# EAGLE board indication (EAGLE 9.6.1)
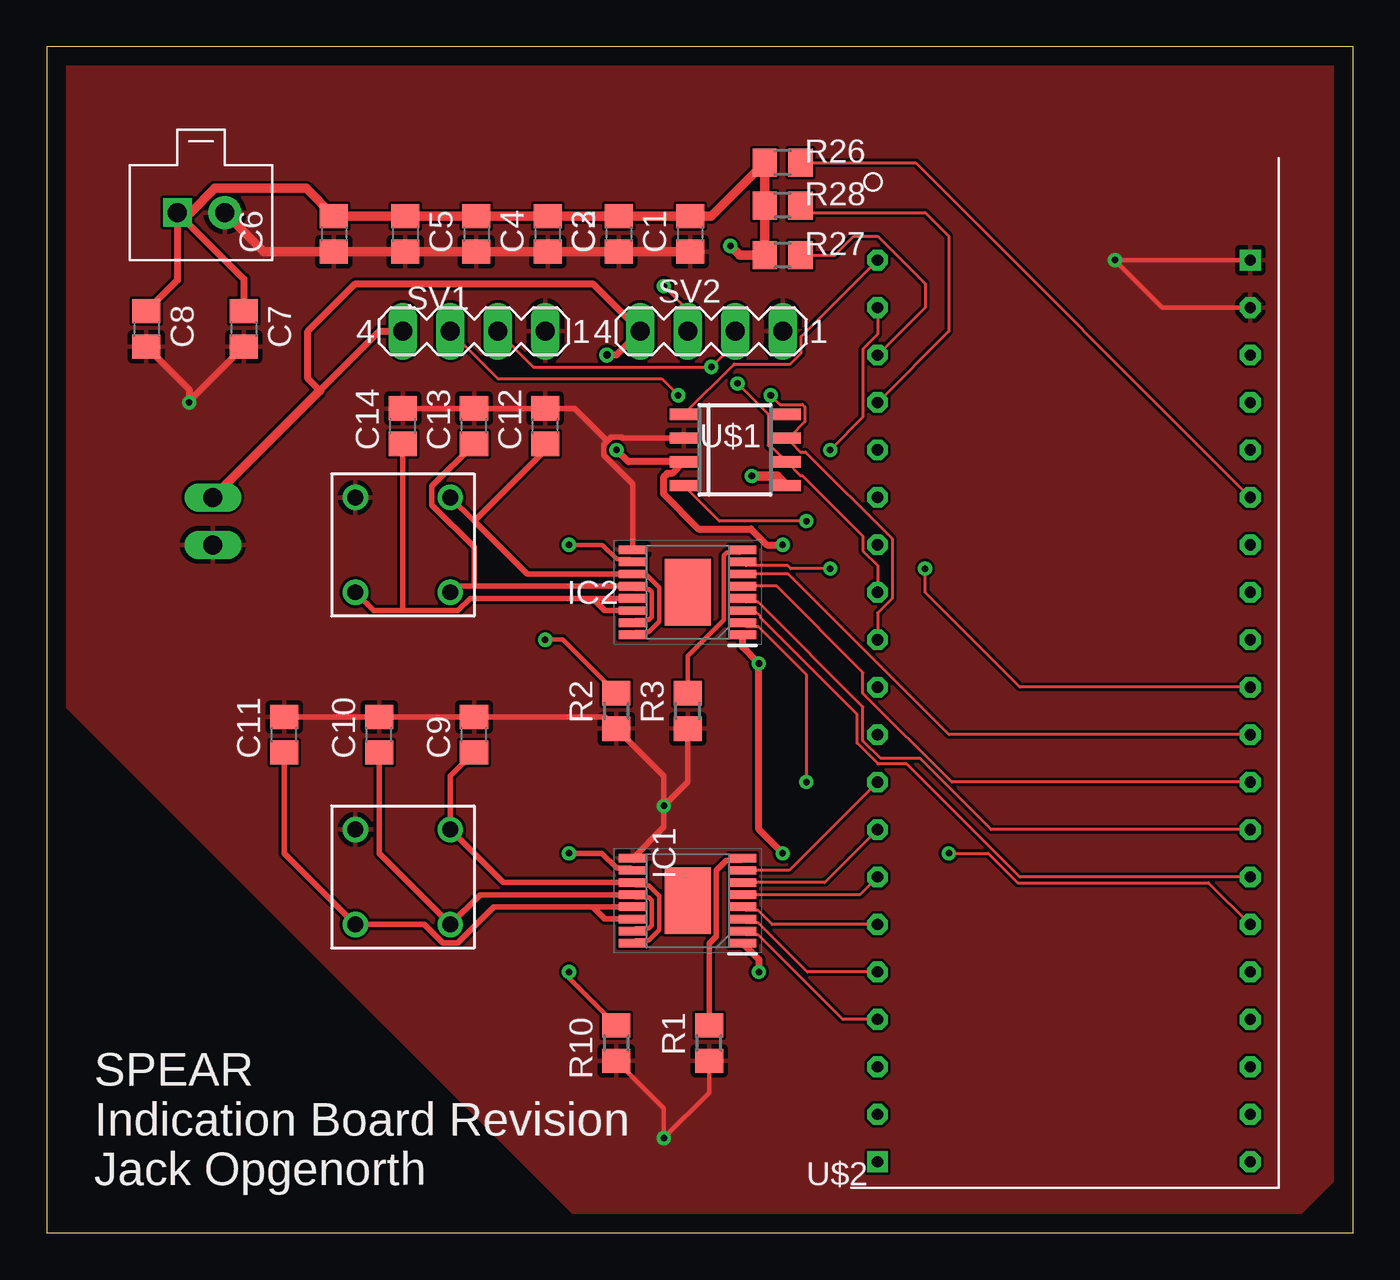
[diagram p0: board, top side]
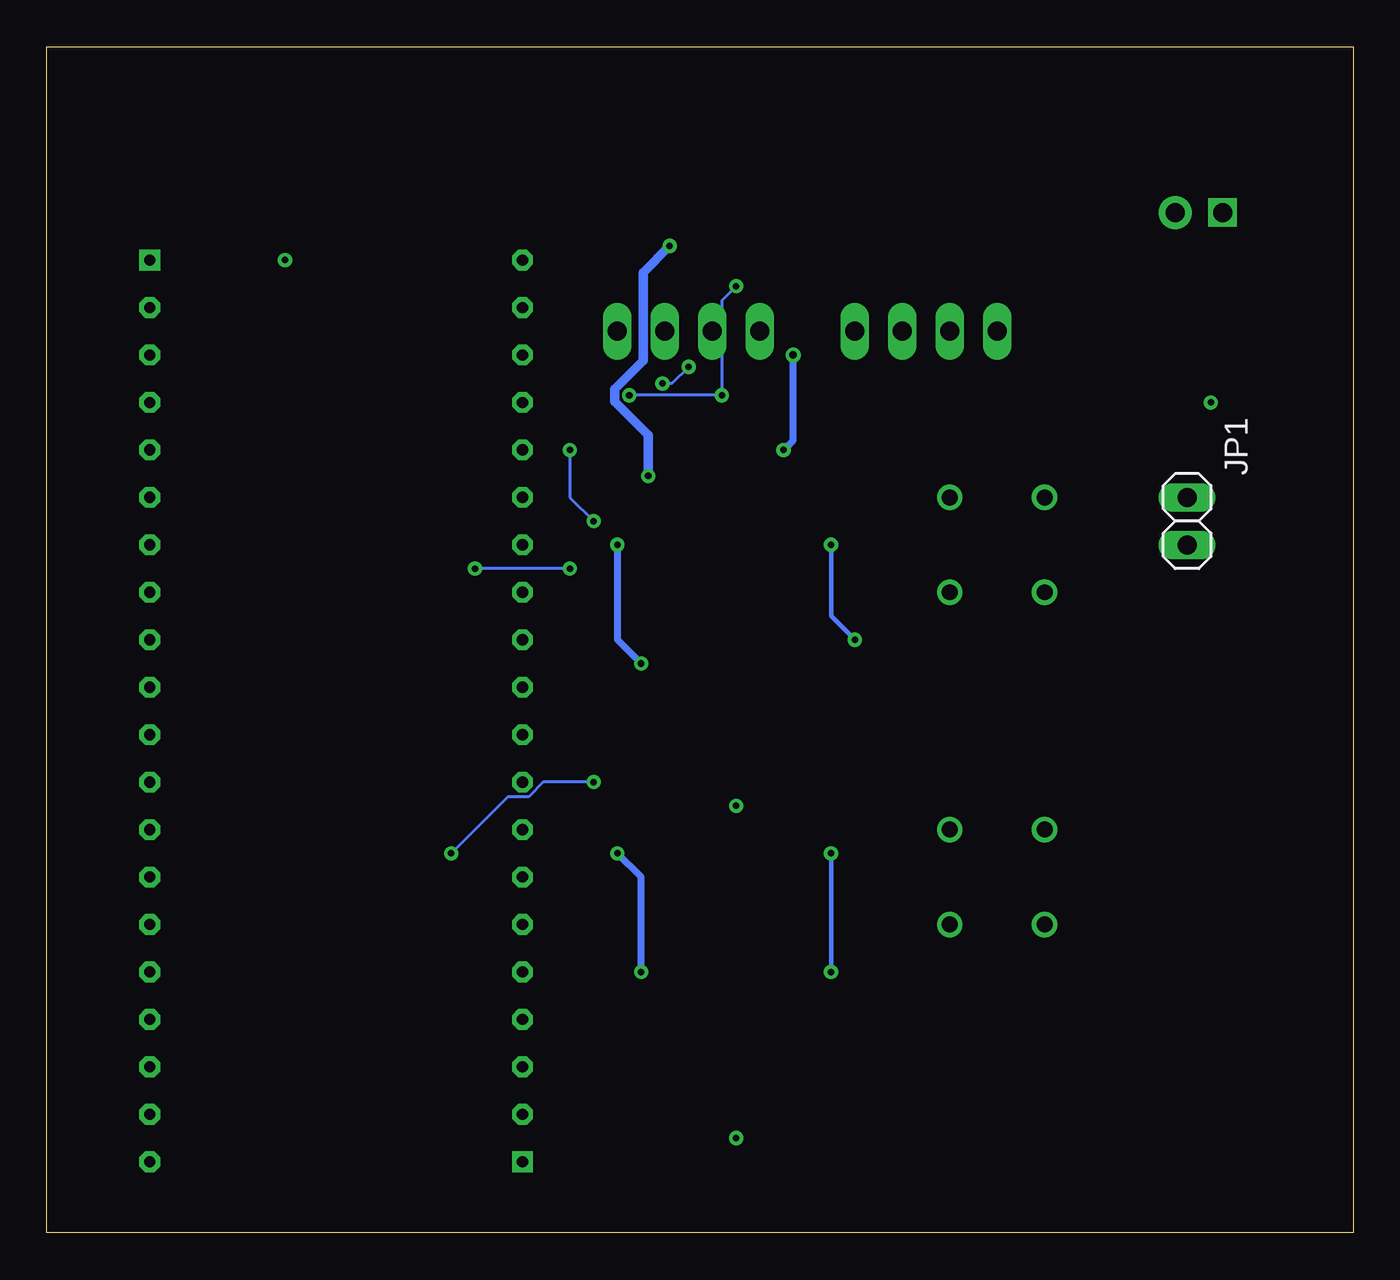
[diagram p1: board, bottom side, seen from below]

Size 69.9 x 63.49 mm. Coordinates in mm from the lower left corner, seen from the top.
Outline: 0,0 69.9,0 69.9,63.49 0,63.49 0,0
Copper layers (1*16): Top 0.035mm / dielectric 1.5mm / Bottom 0.035mm
Design rules "default": minimum track width 6mil, minimum drill 0.35mm, track to track 6mil, track to pad 6mil, pad to pad 6mil, via to via 6mil, smd to smd 6mil, copper to edge 40mil, drill to drill 6mil, minimum pad ring 10mil, minimum via ring 8mil, stop-mask expansion 4mil, vias tented up to drill 0mil, thermal gap 10mil

## Footprints (pad centres in the part's own frame; a part is rotated, then mirrored left to right if it is on the bottom)
C0805 = smd 1.3 x 1.5: 1 -0.95,0; 2 0.95,0
SOP65P640X120-17N = smd 1.475 x 0.45: 1 -2.938,2.275; 2 -2.938,1.625; 3 -2.938,0.975; 4 -2.938,0.325; 5 -2.938,-0.325; 6 -2.938,-0.975; 7 -2.938,-1.625; 8 -2.938,-2.275; 9 2.938,-2.275; 10 2.938,-1.625; 11 2.938,-0.975; 12 2.938,-0.325; 13 2.938,0.325; 14 2.938,0.975; 15 2.938,1.625; 16 2.938,2.275 | smd 2.46 x 3.55: 17 0,0
1X02 = drill 1.016 long: 1 -1.27,0; 2 1.27,0
R0805 = smd 1.3 x 1.5: 1 -0.95,0; 2 0.95,0
MA04-1 = drill 1.016 long: 1 -3.81,0; 2 -1.27,0; 3 1.27,0; 4 3.81,0
SOIC8 = smd 0.6 x 1.5: 1 -1.905,-2.75; 2 -0.635,-2.75; 3 0.635,-2.75; 4 1.905,-2.75; 5 1.905,2.75; 6 0.635,2.75; 7 -0.635,2.75; 8 -1.905,2.75
STM-DEV-BOARD = drill 0.6 square: 3.3V 0,0; GND@3 19.939,48.26 | drill 0.6 octagon: 3.3V@2 19.939,43.18; 5V 0,5.08; CANH 0,27.94; CANL 0,30.48; GND 0,2.54; GND@2 19.939,45.72; NRST 19.939,40.64; OSC32_IN 19.939,5.08; OSC32_OUT 19.939,7.62; PA0_WKUP 19.939,10.16; PA1 19.939,12.7; PA2 19.939,15.24; PA3 19.939,17.78; PA4 19.939,20.32; PA5 19.939,22.86; PA6 19.939,25.4; PA7 19.939,27.94; PA8 0,38.1; PA9 0,35.56; PA10 0,33.02; PA15 0,25.4; PB0 19.939,30.48; PB1 19.939,33.02; PB2 19.939,2.54; PB3_SWO 0,22.86; PB4 0,20.32; PB5 0,17.78; PB6 0,15.24; PB7 0,12.7; PB8 0,10.16; PB9 0,7.62; PB10 19.939,35.56; PB11 19.939,38.1; PB12 0,48.26; PB13 0,45.72; PB14 0,43.18; PB15 0,40.64; VBAT 19.939,0
R50RGB-4-0045 = drill 0.85 pad 1.016: P$1 1.27,1.27; P$2 1.27,6.35; P$3 6.35,6.35; P$4 6.35,1.27
TE-CONN_5-103669-1 = drill 1.016 square: P$1 -1.27,0 | drill 1.016 pad 1.778: P$2 1.27,0

## Placement (x,y rotation side)
C1  100n  [C0805]  34.42,53.47 270 top
C2  100n  [C0805]  30.61,53.47 270 top
C3  100n  [C0805]  26.8,53.47 270 top
C4  100n  [C0805]  22.99,53.47 270 top
C5  100n  [C0805]  19.18,53.47 270 top
C6  4u7  [C0805]  15.37,53.47 270 top
C7  10n  [C0805]  10.54,48.39 270 top
C8  1u  [C0805]  5.33,48.39 270 top
C9  100n  [C0805]  22.86,26.67 90 top
C10  100n  [C0805]  17.78,26.67 90 top
C11  100n  [C0805]  12.7,26.67 90 top
C12  100n  [C0805]  26.67,43.18 90 top
C13  100n  [C0805]  22.86,43.18 90 top
C14  100n  [C0805]  19.05,43.18 90 top
IC1  TPS92630QPWPRQ1  [SOP65P640X120-17N]  34.29,17.78 180 top
IC2  TPS92630QPWPRQ1  [SOP65P640X120-17N]  34.29,34.29 180 top
JP1  [1X02]  8.89,38.1 270 bottom
R1  10K  [R0805]  35.43,10.16 90 top
R2  815  [R0805]  30.48,27.94 90 top
R3  10K  [R0805]  34.29,27.94 90 top
R10  815  [R0805]  30.48,10.16 90 top
R26  10k  [R0805]  39.37,57.28 180 top
R27  10k  [R0805]  39.37,52.32 180 top
R28  10k  [R0805]  39.37,54.99 180 top
SV1  [MA04-1]  22.86,48.26 180 top
SV2  [MA04-1]  35.56,48.26 180 top
U$1  MCP2562-E/SN  [SOIC8]  36.83,41.91 270 top
U$2  STM-DEV-BOARD  [STM-DEV-BOARD]  44.45,3.81 0 top
U$3  R50RGB-4-0045  [R50RGB-4-0045]  15.24,15.24 0 top
U$4  TE-CONN_5-103669-1  [TE-CONN_5-103669-1]  8.25,54.61 0 top
U$5  R50RGB-4-0045  [R50RGB-4-0045]  15.24,33.02 0 top

## Library data of the parts
C1-C8 R1-R3 R10 R26-R28 = resistor
C9-C14 = rcl; SPICEPREFIX: C
IC1 IC2 = TPS92630QPWPRQ1; DESCRIPTION: Automotive Three-Channel Linear LED Driver with Analog and PWM Dimming; HEIGHT: 1.2mm; MANUFACTURER_NAME: Texas Instruments; MANUFACTURER_PART_NUMBER: TPS92630QPWPRQ1; MOUSER_PART_NUMBER: 595-TPS92630QPWPRQ1; MOUSER_PRICE-STOCK: https://www.mouser.com/Search/Refine.aspx?Keyword=595-TPS92630QPWPRQ1
JP1 = pinhead
SV1 SV2 = con-lstb; OC_FARNELL: unknown; OC_NEWARK: unknown
U$1 U$2 U$4 = SPEAR
U$3 U$5 = SPEAR-indication

## Nets
+3V3: C1.1 C2.1 C3.1 C4.1 C5.1 C6.1 C7.1 C8.1 R26.2 R27.2 R28.2 U$1.5 U$4.P$1
+5V: IC1.1 IC2.1 JP1.1 SV1.4 SV2.4 U$1.3
CAN_STBY: U$1.8
CANH: SV1.3 SV2.3 U$1.7 U$2.CANH
CANL: SV1.2 SV2.2 U$1.6 U$2.CANL
GND: C1.2 C2.2 C3.2 C4.2 C5.2 C6.2 C7.2 C8.2 C9.2 C10.2 C11.2 C12.2 C13.2 C14.2 IC1.9 IC2.9 JP1.2 R1.1 R2.1 R3.1 R10.1 SV1.1 SV2.1 U$1.2 U$2.GND@2 U$2.GND@3 U$3.P$2 U$4.P$2 U$5.P$2
I2C_SCL: R27.1 U$2.PB14
I2C_SDA: R28.1 U$2.PB15
L1OUT1: C9.1 IC1.11 IC1.16 U$3.P$3
L1OUT2: C10.1 IC1.12 IC1.15 U$3.P$4
L1OUT3: C11.1 IC1.13 IC1.14 U$3.P$1
L2OUT1: C12.1 IC2.11 IC2.16 U$5.P$3
L2OUT2: C13.1 IC2.12 IC2.15 U$5.P$4
L2OUT3: C14.1 IC2.13 IC2.14 U$5.P$1
LED_!OE: R26.1 U$2.PB10
N$1: IC1.10 R10.2
N$2: IC2.8 R3.2
N$3: IC2.10 R2.2
N$12: IC1.8 R1.2
PA1: IC2.2 U$2.PA1
PA2: IC2.3 U$2.PA2
PA3: IC2.4 U$2.PA3
PA4: IC2.5 U$2.PA4
PA5: IC2.6 U$2.PA5
PA6: IC2.7 U$2.PA6
PB4: IC1.7 U$2.PB4
PB5: IC1.6 U$2.PB5
PB6: IC1.5 U$2.PB6
PB7: IC1.4 U$2.PB7
PB8: IC1.3 U$2.PB8
PB9: IC1.2 U$2.PB9
STM_CANRX: U$1.4 U$2.PB13
STM_CANTX: U$1.1 U$2.PB12

## Tracks (layer width: path | path; a pad name or v marks a point on that pad's centre or on a via)
+3V3  (via drill 0.35)
  Top 0.381: C8.1 6.98,50.99 U$4.P$1 10.54,51.05 C7.1
  Top 0.508: U$4.P$1 7.69,54.61 8.99,55.91 13.88,55.91 C6.1 C5.1 C4.1 C3.1 C2.1 C1.1 35.56,54.42 R26.2 R28.2 R27.2 37.08,52.32 v36.58,52.83 | v37.72,40.51 39.07,40.51 U$1.5
  Bottom 0.508: v37.72,40.51 37.72,42.71 39.52,44.51 39.52,45.16 38,46.68 38,51.41 v36.58,52.83
+5V  (via drill 0.35, 0.4)
  Top 0.381: SV1.4 17.78,48.26 14.6,45.09 13.97,45.72 13.97,48.26 16.51,50.8 29.21,50.8 SV2.4 30.48,46.99 v29.97,46.99 | v30.48,41.91 31.12,41.28 U$1.3 33.45,40.65 33.19,40.65 32.99,40.45 32.99,39.56 34.87,37.68 37.67,37.68 38.52,36.83 v39.37,36.83 | IC1.1 38.1,14.63 v38.1,13.97 | v39.37,20.32 38.1,21.59 v38.1,30.48 37.23,31.35 IC2.1
  Top 0.508: JP1.1 14.6,45.09
  Bottom 0.381: v30.48,41.91 29.97,42.42 v29.97,46.99 | v38.1,13.97 38.1,19.05 v39.37,20.32 | v39.37,36.83 39.37,31.75 v38.1,30.48
CANH  (via drill 0.35)
  Top 0.152: U$1.7 39.79,42.33 | 39.79,42.33 40.32,41.8 40.58,41.8 45.23,37.15 45.23,33.97 44.45,33.18 U$2.CANH | SV1.3 24.13,45.72 32.89,45.72 v33.78,44.83 | v38.73,44.83 39.22,44.34 40.42,44.34 40.56,44.21 40.56,43.42 39.79,42.65 39.79,42.33 | SV2.3 34.29,49.4 v33.02,50.67
  Bottom 0.152: v38.73,44.83 v33.78,44.83 33.78,49.91 v33.02,50.67
CANL  (via drill 0.35)
  Top 0.152: U$2.CANL 44.45,35.72 43.67,36.51 43.67,37.29 40.42,40.53 40.32,40.53 U$1.6 38.84,42.02 38.73,42.02 38.6,42.15 38.6,43.82 v36.96,45.47 | SV2.2 36.83,47.62 v35.56,46.36 26.03,46.36 SV1.2
  Bottom 0.152: v35.56,46.36 36.45,45.47 v36.96,45.47
GND  (via drill 0.35)
  Top 0.254: U$2.GND@2 59.69,49.53 v57.15,52.07 U$2.GND@3 | R10.1 33.02,6.67 v33.02,5.08 35.43,7.49 R1.1
  Top 0.305: C14.2 C13.2 C12.2 28.26,44.13 30,42.39 | v33.02,22.86 33.02,24.45 R2.1 29.85,27.62 C9.2 C10.2 C11.2 | R3.1 34.29,24.13 v33.02,22.86 | IC1.9 33.02,21.72 v33.02,22.86 | 30,42.39 29.8,42.19 29.8,41.63 31.35,40.07 IC2.9 | 30,42.39 30.2,42.59 30.76,42.59 30.81,42.55 U$1.2
  Top 0.381: C8.2 7.62,45.15 v7.62,44.45 7.62,44.52 C7.2
  Top 0.508: U$4.P$2 11.62,52.52 C6.2 C5.2 C4.2 C3.2 C2.2 C1.2
  pour Top: 0,63.5 0,29.21 29.21,0 66.04,0 69.85,3.81 69.85,63.5
I2C_SCL
  Top 0.152: R27.1 42.16,52.32 43.18,53.34 44.45,53.34 46.99,50.8 46.99,49.53 U$2.PB14
I2C_SDA
  Top 0.152: R28.1 40.7,54.61 46.99,54.61 48.26,53.34 48.26,48.26 U$2.PB15
L1OUT1
  Top 0.152: 31.4,18.7 IC1.11
  Top 0.254: IC1.16 31.5,15.65 32.2,15.65 32.77,16.22 32.77,18.04 32.2,18.61 31.5,18.61 31.4,18.7
  Top 0.305: IC1.11 24.42,18.75 U$3.P$3 21.59,24.45 C9.1
L1OUT2
  Top 0.254: IC1.15 31.5,16.3 32.2,16.3 32.37,16.46 32.37,17.8 32.2,17.96 31.5,17.96 IC1.12
  Top 0.305: IC1.12 23.18,18.11 U$3.P$4 17.78,20.32 C10.1
L1OUT3
  Top 0.305: IC1.13 29.21,17.45 | 29.21,17.45 23.93,17.45 22,15.53 21.18,15.53 20.2,16.51 U$3.P$1 12.7,20.32 C11.1 | IC1.14 29.86,16.8 29.21,17.45
L2OUT1
  Top 0.152: 31.75,35.27 IC2.11
  Top 0.254: IC2.16 31.5,32.16 32.2,32.16 32.77,32.73 32.77,34.55 32.06,35.27 IC2.11
  Top 0.305: IC2.11 25.7,35.27 22.86,38.1 | 22.86,38.1 U$5.P$3 | C12.1 26.67,41.91 22.86,38.1
L2OUT2
  Top 0.254: IC2.15 31.5,32.81 32.2,32.81 32.37,32.97 32.37,34.31 32.2,34.47 31.5,34.47 IC2.12
  Top 0.305: IC2.12 22.86,34.62 | 22.86,34.62 21.91,34.62 U$5.P$4 | 22.86,34.62 22.86,36.71 20.61,38.96 20.61,39.37 20.61,39.78 20.61,39.98 C13.1
L2OUT3
  Top 0.305: IC2.13 29.21,33.97 | 29.21,33.97 22.66,33.97 22,33.31 19.05,33.31 | 19.05,33.31 17.49,33.31 U$5.P$1 | IC2.14 29.86,33.32 29.21,33.97 | C14.1 19.05,33.31
LED_!OE
  Top 0.152: R26.1 46.48,57.28 U$2.PB10
N$1  (via drill 0.35)
  Top 0.254: R10.2 27.94,13.65 v27.94,13.97
  Top 0.305: IC1.10 31.23,19.52 30.49,19.52 29.69,20.32 v27.94,20.32
  Bottom 0.254: v27.94,20.32 v27.94,13.97
N$2
  Top 0.254: IC2.8 37.08,36.42 36.37,36.42 36.21,36.26 36.21,32.81 34.29,30.89 R3.2
N$3  (via drill 0.35)
  Top 0.254: R2.2 27.62,31.75 v26.67,31.75 | IC2.10 31.21,36.06 30.5,36.06 29.73,36.83 v27.94,36.83
  Bottom 0.254: v27.94,36.83 27.94,33.02 v26.67,31.75
N$12
  Top 0.305: IC1.8 37.11,19.93 36.36,19.93 35.82,19.39 35.82,15.88 35.43,15.49 R1.2
PA1  (via drill 0.35)
  Top 0.152: IC2.2 37.42,32.47 38.06,32.47 40.64,29.89 v40.64,24.13 | v48.26,20.32 50.37,20.32 51.94,18.74 62.15,18.74 U$2.PA1
  Bottom 0.152: v40.64,24.13 43.34,24.13 44.13,23.35 45.23,23.35 v48.26,20.32
PA2
  Top 0.152: U$2.PA2 52.07,19.05 46.02,25.1 44.49,25.1 43.36,26.22 43.36,27.76 38.19,32.93 38.19,32.98 37.86,33.32 IC2.3
PA3
  Top 0.152: U$2.PA3 50.53,21.59 46.72,25.4 44.61,25.4 43.67,26.35 43.67,28.16 38.06,33.77 37.42,33.77 IC2.4
PA4
  Top 0.152: U$2.PA4 48.42,24.13 43.67,28.89 43.67,29.99 39.04,34.62 IC2.5
PA5
  Top 0.152: U$2.PA5 48.26,26.67 39.66,35.27 IC2.6
PA6  (via drill 0.35)
  Top 0.152: U$2.PA6 52.07,29.21 46.99,34.29 v46.99,35.56 | v41.91,35.56 39.8,35.56 39.64,35.72 37.42,35.72 IC2.7
  Bottom 0.152: v41.91,35.56 v46.99,35.56
PB4
  Top 0.152: U$2.PB4 39.73,19.4 IC1.7
PB5
  Top 0.152: U$2.PB5 41.62,18.75 IC1.6
PB6
  Top 0.152: U$2.PB6 43.51,18.11 IC1.5
PB7
  Top 0.152: IC1.4 37.42,17.26 38.06,17.26 38.81,16.51 U$2.PB7
PB8
  Top 0.152: IC1.3 37.42,16.61 38.06,16.61 40.7,13.97 U$2.PB8
PB9
  Top 0.152: IC1.2 37.42,15.96 38.06,15.96 42.59,11.43 U$2.PB9
STM_CANRX  (via drill 0.35)
  Top 0.152: U$2.PB13 44.45,48.1 43.67,47.31 43.67,43.67 v41.91,41.91 | v40.64,38.1 35.98,38.1 U$1.4
  Bottom 0.152: v41.91,41.91 41.91,39.37 v40.64,38.1
STM_CANTX
  Top 0.152: U$1.1 36.77,46.51 39.78,46.51 40.36,47.09 40.36,47.98 U$2.PB12

## Text on the board
_tsilk: SPEAR / Indication Board Revision / Jack Opgenorth